# Altium PCB alps_adapter.PcbDoc
Units mm, origin at the board's own origin, x right, y up, seen from the top; angles counter-clockwise.
Board outline 40 x 32.5 mm, 2 copper layers (Top Layer, Bottom Layer), stack 1.671 mm thick; 3 components, 18 nets, 48 pads, 0 vias.
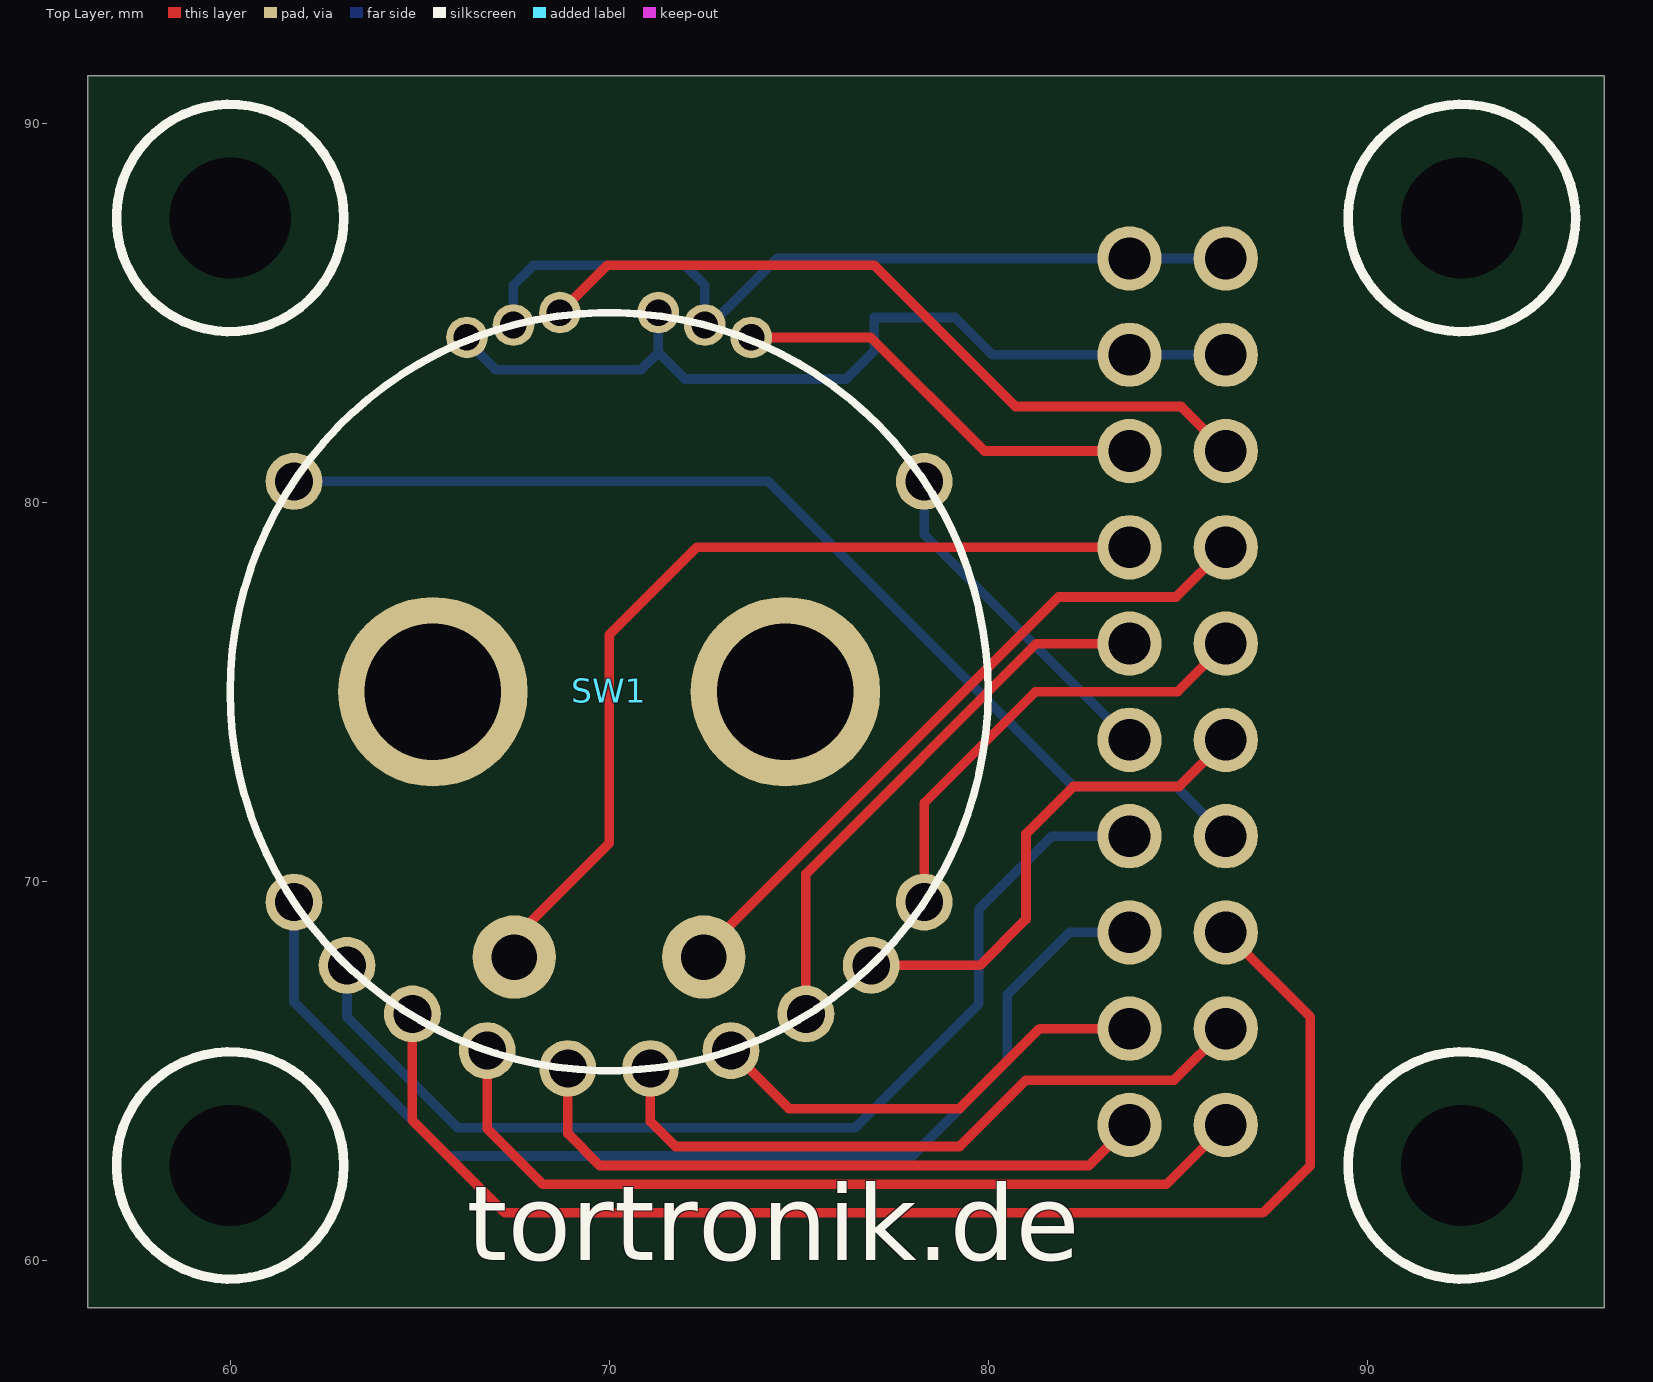
[diagram p0: Top Layer view]
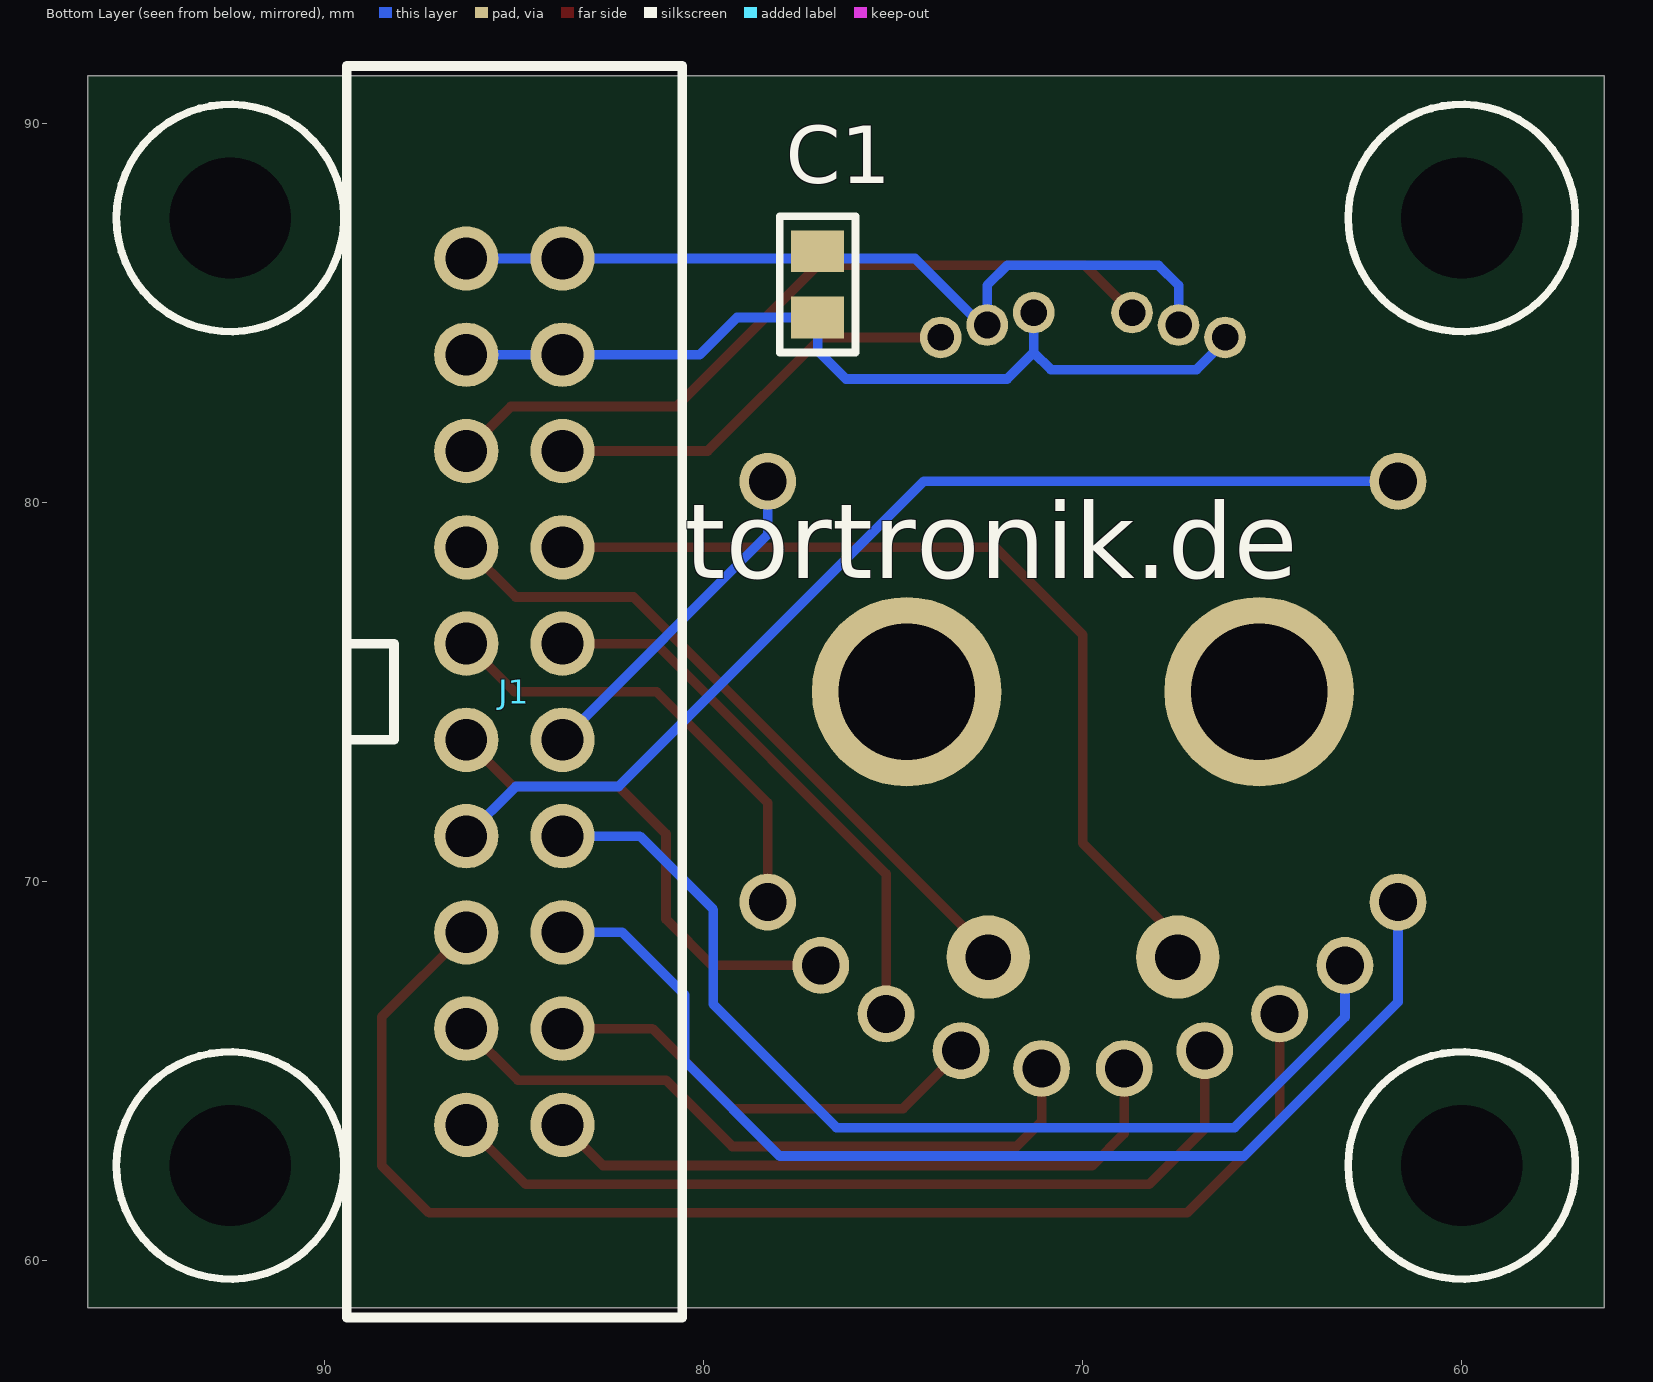
[diagram p1: Bottom Layer view, seen from below]

## Layer stack, top to bottom
Top Solder: solder mask 0.0102, Solder Resist, Dk 3.5
Top Layer: signal copper 0.0356
Dielectric1: core 1.6, FR-4, Dk 4.8
Bottom Layer: signal copper 0.0356
Bottom Solder: solder mask 0.0102, Solder Resist, Dk 3.5

## Board outline
56.25,58.75 56.25,91.25 96.25,91.25 96.25,58.75

## Design rules (kind name [scope] priority, off if disabled: settings)
Clearance [All] p1: gap=0.2 ignorepadtopadclearanceinfootprint=FALSE except(0: Arc-Hole Track-Hole SMDPad-Hole THPad-Hole Via-Hole Fill-Hole Poly-Hole Region-Hole Text-Hole)
HoleSize [All] p1: absolutevalues=TRUE maxlimit=6 minlimit=0.25 maxpercent=80.000 minpercent=20.000
PolygonConnect [All] p1: connectstyle=Relief reliefconductorwidth=0.254 reliefentries=4 polygonreliefangle="90 Angle" airgapwidth=0.254
RoutingVias [All] p1: holewidth=0.6 width=1 viastyle="Through Hole" minholewidth=0.3 minwidth=0.6 maxholewidth=1 maxwidth=1.3
SolderMaskExpansion [All] p1: expansion=0.102
Width [All] p1: maxlimit=2 minlimit=0.15 preferedwidth=0.4
29 further rules are at their usual default settings.

## Components (designator, comment, footprint, x,y, rotation, side; value= is the part's Value field where it differs from the comment)
C1 "100nF 50V MLCC 0805" 0805 77,85.75 r90 bottom
J1 "Wannenstecker 20pol 2,54mm" WSL20G 85,75 r270 bottom
SW1 "M20B4014A01" ALPS_EM20B4014A01-LED 70,75 r0 top

## Footprints (in the part's own frame and the unit in brackets; to place one, negate y for a bottom-side part, rotate by r counter-clockwise, add the part's x,y. Pads: shape width x height; smd on the part's side, far side on the other; paste and mask are expansions set on the pad)
0805 [mm]
  rect 1.1x1.4 smd: 1(-0.875,0) 2(0.875,0)
  silkscreen extent -1.8,-1 1.8,1, body extent -0.98,-0.62 1.02,0.63, height 0.78
ALPS_EM20B4014A01-LED [mm]
  round 5 hole 3.6: 0(-4.65,0) 0(4.65,0)
  round 1.5 hole 1: 1(-8.315,5.55) 2(-8.315,-5.55) 3(-6.915,-7.22) 4(-5.19,-8.5) 5(-3.215,-9.47) 6(-1.09,-9.94) 7(1.09,-9.94) 8(3.215,-9.47) 9(5.19,-8.5) 10(6.915,-7.22) 11(8.315,-5.55) 12(8.315,5.55)
  round 2.2 hole 1.2: A(-2.5,-7) B(2.5,-7)
  round 1.1 hole 0.7: C(-3.752,9.347) D(-2.525,9.676) E(-1.298,10.005) F(1.298,10.005) G(2.525,9.676) H(3.752,9.347)
  silkscreen extent -10,-10 10,10, body extent -10,-11.5 10,11.5, height 31
WSL20G [mm]
  round 1.7 hole 1.1: 1(-11.43,-1.27) 2(-11.43,1.27) 3(-8.89,-1.27) 4(-8.89,1.27) 5(-6.35,-1.27) 6(-6.35,1.27) 7(-3.81,-1.27) 8(-3.81,1.27) 9(-1.27,-1.27) 10(-1.27,1.27) 11(1.27,-1.27) 12(1.27,1.27) 13(3.81,-1.27) 14(3.81,1.27) 15(6.35,-1.27) 16(6.35,1.27) 17(8.89,-1.27) 18(8.89,1.27) 19(11.43,-1.27) 20(11.43,1.27)
  silkscreen extent -16.51,-4.43 16.51,4.43, body extent -14.6,-4.54 14.61,4.83, height 9.27

## Part data
SW1: library part ALPS_EM20B4014A01-LED, "ALPS magnetic rotary encoder with leds"

## Free pads (board coordinates)
  round 1 hole 3.2: 0(92.5,62.5) 1(92.5,87.5) 2(60,87.5) 3(60,62.5)

## Nets (pads, with @x,y where several pads share a name; then routed paths per layer and width w, separated by ;. In a path a pad name is that pad's centre, name@x,y a point inside that pad or via, vN(x,y) a via of type N, cw(c..) or ccw(c..) an arc to the next point about the centre after c; other vN are vias at no path point)
5V: C1.1 J1.3 J1.4 SW1.C SW1.F | length 23.6
  Bottom Layer w0.254: SW1.C 66.248,84.252 67,83.5 70.846,83.5 71.298,83.952 ; SW1.F 71.298,83.952 ; J1.3 J1.4 80.11,83.89 79.125,84.875 C1.1 77,84 76.25,83.25 72,83.25 71.298,83.952
GND: C1.2 J1.1 J1.2 SW1.D SW1.G | length 22.1
  Bottom Layer w0.254: SW1.D 67.475,85.725 68,86.25 72,86.25 72.525,85.725 SW1.G 72.676,84.676 74.43,86.43 J1.2 J1.1
NetJ1_5: J1.5 SW1.E | length 20.1
  Top Layer w0.254: SW1.E 69.947,86.25 77,86.25 80.723,82.527 85.093,82.527 J1.5
NetJ1_6: J1.6 SW1.H | length 11.2
  Top Layer w0.254: SW1.H 76.903,84.347 79.9,81.35 J1.6
NetJ1_7: J1.7 SW1.B | length 18.3
  Top Layer w0.254: SW1.B 72.5,68.142 81.858,77.5 84.96,77.5 J1.7
NetJ1_8: J1.8 SW1.A | length 24.2
  Top Layer w0.254: SW1.A 67.5,68.5 70,71 70,76.5 72.31,78.81 J1.8
NetJ1_9: J1.9 SW1.11 | length 12.3
  Top Layer w0.254: SW1.11 78.315,72.065 81.25,75 85,75 J1.9
NetJ1_10: J1.10 SW1.9 | length 14.7
  Top Layer w0.254: SW1.9 75.19,70.19 81.27,76.27 J1.10
NetJ1_11: J1.11 SW1.10 | length 13.1
  Top Layer w0.254: SW1.10 79.78,67.78 81,69 81,71.25 82.25,72.5 85.04,72.5 J1.11
NetJ1_12: J1.12 SW1.12 | length 9.1
  Bottom Layer w0.254: SW1.12 78.315,79.145 J1.12
NetJ1_13: J1.13 SW1.1 | length 28.5
  Bottom Layer w0.254: SW1.1 74.2,80.55 82.25,72.5 84.96,72.5 J1.13
NetJ1_14: J1.14 SW1.3 | length 27.9
  Bottom Layer w0.254: SW1.3 63.085,66.415 66,63.5 76.5,63.5 79.75,66.75 79.75,69.25 81.69,71.19 J1.14
NetJ1_15: J1.15 SW1.4 | length 35.1
  Top Layer w0.254: SW1.4 64.81,63.69 67.25,61.25 87.25,61.25 88.5,62.5 88.5,66.42 J1.15
NetJ1_16: J1.16 SW1.2 | length 29.8
  Bottom Layer w0.254: SW1.2 61.685,66.815 65.75,62.75 78,62.75 80.5,65.25 80.5,67 82.15,68.65 J1.16
NetJ1_17: J1.17 SW1.7 | length 18.1
  Top Layer w0.254: SW1.7 71.09,63.66 71.75,63 79.25,63 81,64.75 84.91,64.75 J1.17
NetJ1_18: J1.18 SW1.8 | length 12
  Top Layer w0.254: SW1.8 74.745,64 79.25,64 81.36,66.11 J1.18
NetJ1_19: J1.19 SW1.5 | length 22.8
  Top Layer w0.254: SW1.5 66.785,63.465 68.25,62 84.7,62 J1.19
NetJ1_20: J1.20 SW1.6 | length 17.3
  Top Layer w0.254: SW1.6 68.91,63.34 69.75,62.5 82.66,62.5 J1.20
pads on no net: SW1.0

## Silkscreen, mask and mechanical layers (free items; w line width, h text height)
Top Overlay:
  circle w0.25: c60,62.5 r3
  circle w0.25: c92.5,62.5 r3
  circle w0.25: c92.5,87.5 r3
  circle w0.25: c60,87.5 r3
  text "tortronik.de" at 66.25,60 h2
Bottom Overlay:
  circle w0.2: c60,87.5 r3
  circle w0.2: c92.5,87.5 r3
  circle w0.2: c92.5,62.5 r3
  circle w0.2: c60,62.5 r3
  text "tortronik.de" at 80.5,78 h2
Mechanical 2:
  lines w0.02: 56.25,58.75 96.25,58.75 96.25,91 96.25,91.25 56.25,91.25 56.25,58.75